# Altium PCB PCB.PcbDoc
Units mm, origin at the board's own origin, x right, y up, seen from the top; angles counter-clockwise.
Board outline 152.4 x 101.6 mm, 2 copper layers (Top Layer, Bottom Layer); 60 components, 47 nets, 204 pads, 40 vias.
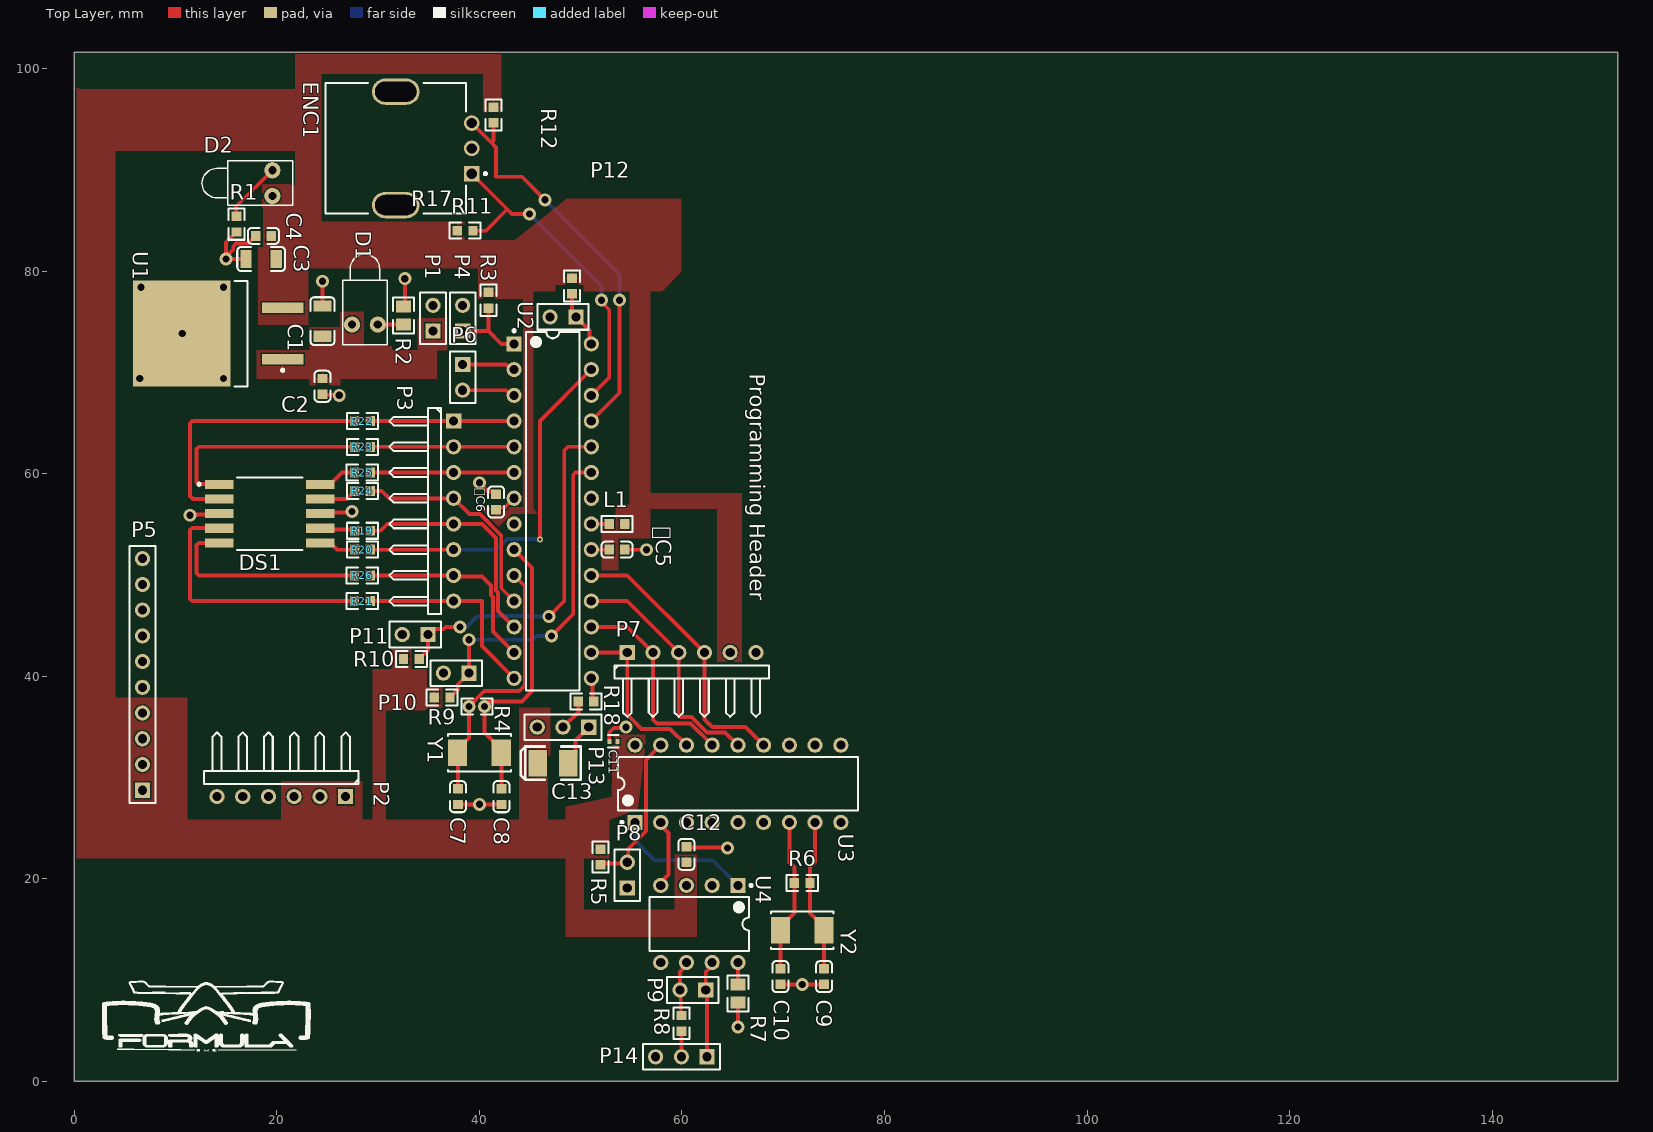
[diagram p0: Top Layer view]
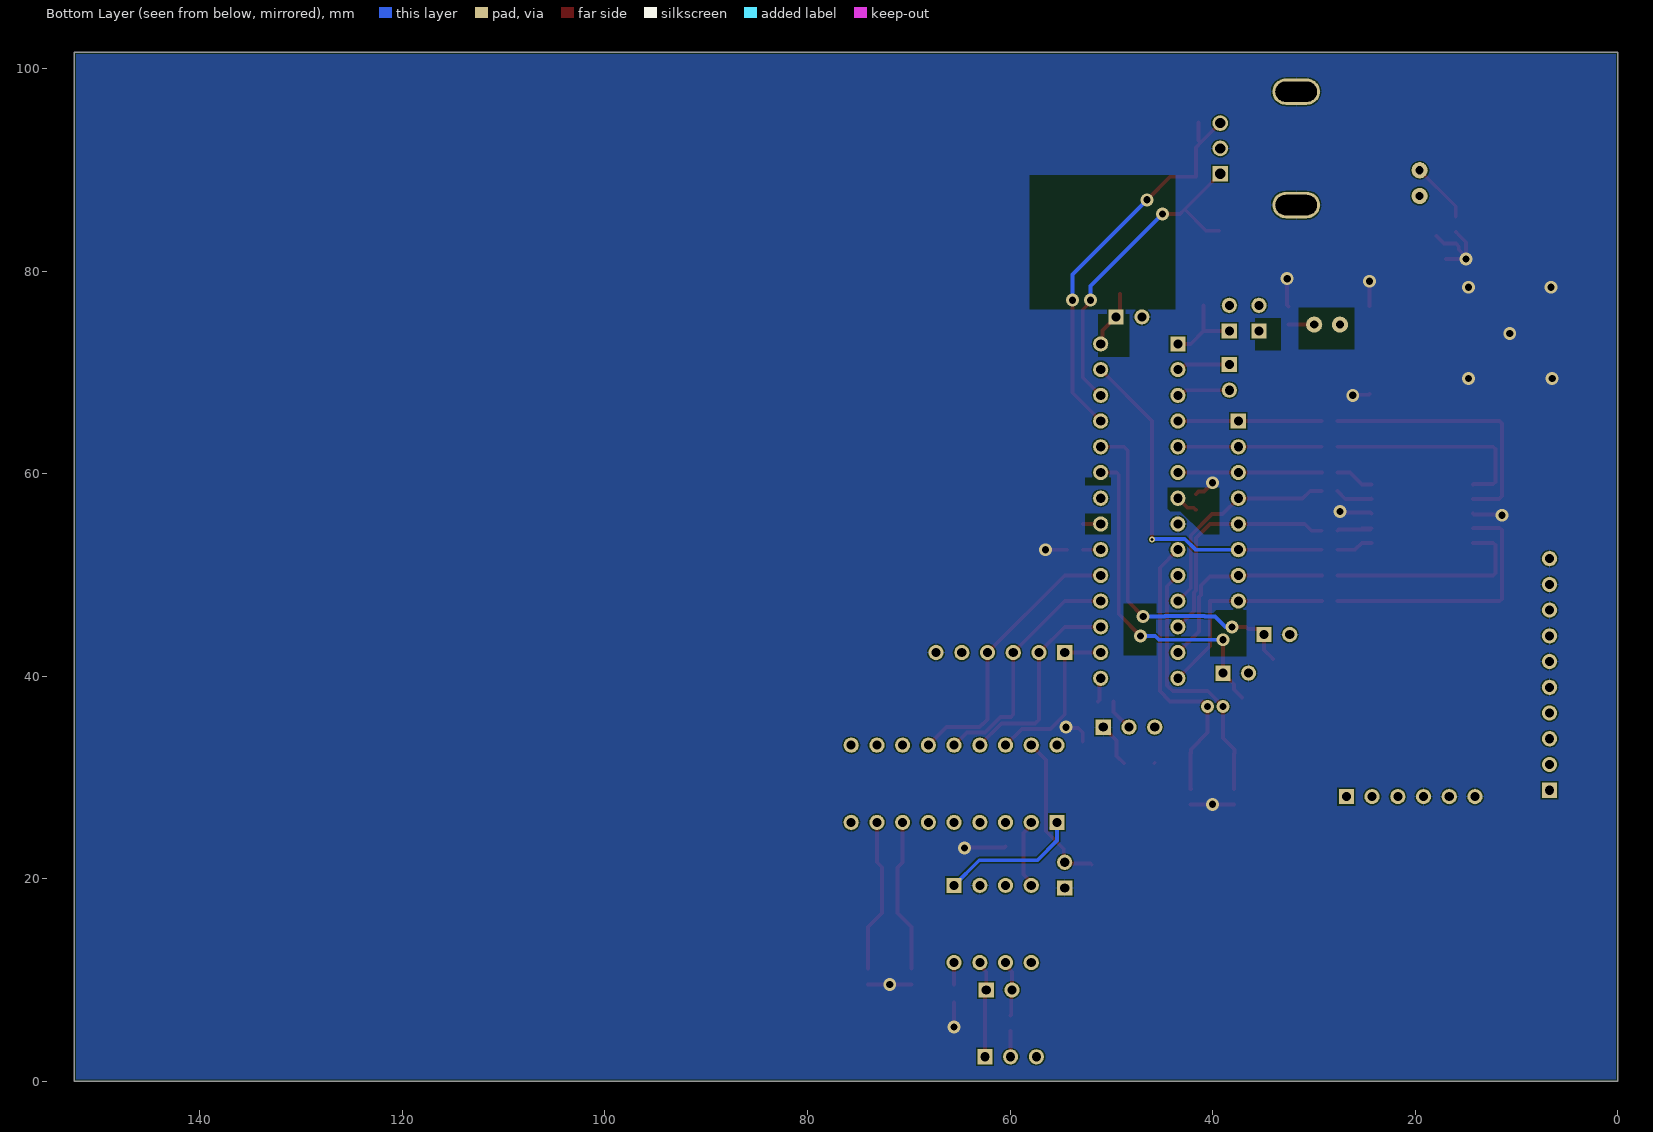
[diagram p1: Bottom Layer view, seen from below]
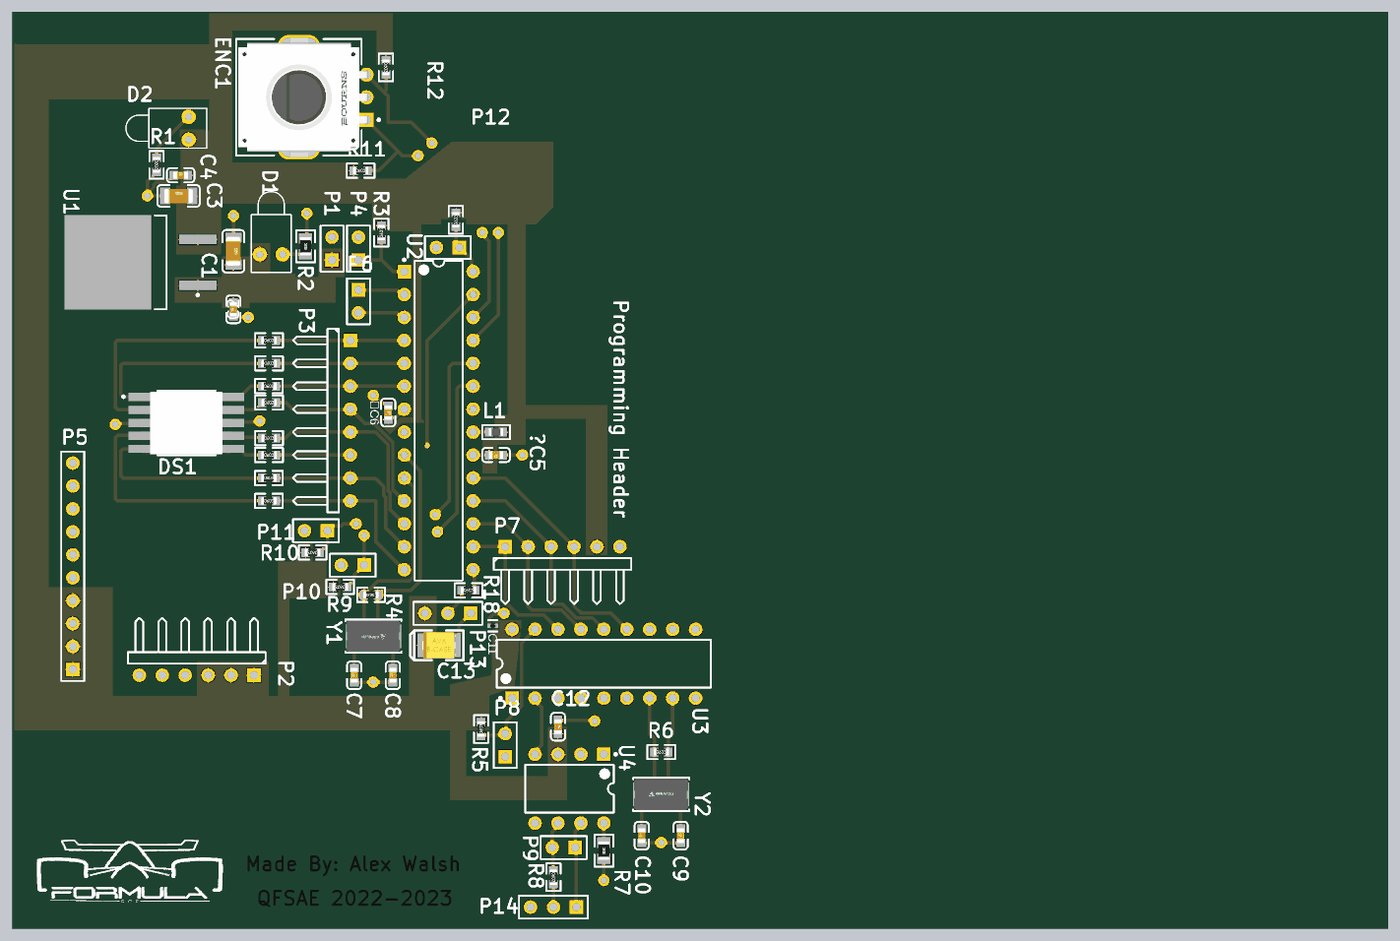
[diagram p2: 3D render of the assembled board from above, using the file's embedded part models]

## Layer stack, top to bottom
Top Solder: solder mask 0.0102, Solder Resist, Dk 3.5
Top Layer: signal copper 0.0356
Dielectric 1: dielectric 0.32, FR-4, Dk 4.8
Bottom Layer: signal copper 0.0356
Bottom Solder: solder mask 0.0102, Solder Resist, Dk 3.5

## Board outline
0,0 152.4,0 152.4,101.6 0,101.6

## Design rules (kind name [scope] priority, off if disabled: settings)
BoardOutlineClearance [All] p1: gap=0.2 ignorepadtopadclearanceinfootprint=FALSE
Clearance [All] p1: gap=0.127 ignorepadtopadclearanceinfootprint=FALSE except(0.25: Arc-Hole Track-Hole SMDPad-Hole THPad-Hole Via-Hole Fill-Hole Poly-Hole Region-Hole Text-Hole)
ComponentClearance [All] p1: gap=0.127 collisioncheckmode=3 verticalgap=0.127 showdistances=TRUE
DiffPairsRouting [All] p1: maxlimit=0.254 minlimit=0.127 mostfreqgap=0.127 toplayer_minwidth=0.127 toplayer_maxwidth=25.4 toplayer_prefwidth=0.127 bottomlayer_minwidth=0.127 bottomlayer_maxwidth=25.4 bottomlayer_prefwidth=0.127 maxuncoupledlength=12.7
Height [All] p1: minheight=0 maxheight=1816.048 prefheight=12.7
HoleSize [All] p1: absolutevalues=TRUE maxlimit=6.3 minlimit=0.3 maxpercent=80.000 minpercent=20.000
HoleToHoleClearance [All] p1: gap=0.25 allowstackedmicrovias=FALSE
MinimumAnnularRing [All] p1: minimumring=0.076
MinimumSolderMaskSliver [All] p1: minsoldermaskwidth=0
PlaneClearance [All] p1: clearance=0.127
PlaneConnect PlaneConnectPowerPads [InPadClass('PowerPads')] p1: planeconnectstyle=Direct reliefexpansion=0.508 reliefentries=4 reliefconductorwidth=0.254 reliefairgap=0.254
PlaneConnect [All] p2: pad.planeconnectstyle=Relief pad.reliefexpansion=0.3 pad.reliefentries=4 pad.reliefconductorwidth=0.127 pad.reliefairgap=0.127 via.planeconnectstyle=Direct via.reliefexpansion=0.3 via.reliefentries=4 via.reliefconductorwidth=0.127 via.reliefairgap=0.127
PolygonConnect PolygonConnectPowerPads [All vs (InPadClass('PowerPads'))] p1: connectstyle=Direct reliefconductorwidth=0.254 reliefentries=4 polygonreliefangle="90 Angle" airgapwidth=0.254
PolygonConnect [All] p2: thpad.connectstyle=Relief thpad.reliefconductorwidth=0.127 thpad.reliefentries=4 thpad.polygonreliefangle="90 Angle" thpad.airgapwidth=0.127 smdpad.connectstyle=Relief smdpad.reliefconductorwidth=0.127 smdpad.reliefentries=4 smdpad.polygonreliefangle="90 Angle" smdpad.airgapwidth=0.127 via.connectstyle=Direct via.reliefconductorwidth=0.127 via.reliefentries=4 via.polygonreliefangle="90 Angle" via.airgapwidth=0.127
RoutingVias [All] p1: holewidth=0.3 width=0.6 viastyle="Through Hole" minholewidth=0.3 minwidth=0.6 maxholewidth=0.6 maxwidth=6.6
SilkToSilkClearance [All] p1: silktosilkclearance=0
SilkToSolderMaskClearance [IsPad] p1: minsilkscreentomaskgap=0.127 clearancetoexposedcopper=TRUE
SolderMaskExpansion [All] p1: expansion=0.075 istentingtop=FALSE
Width [All] p1: maxlimit=25.4 minlimit=0.127 preferedwidth=0.127 minimp=50.000000 maximp=50.000000 favimp=50.000000
20 further rules are at their usual default settings.

## Classes and differential pairs
component class VoltageRegulator: C1 C2 C3 C4 D1 D2 P1 R1 R2 U1
component class startStop: P12 R17
component class shiftLights: C13 P13 R18
component class shifting_buttons: P10 P11 R9 R10
component class rotaryEncoder: ENC1 R11 R12
component class MCP2551: C12 P9 P14 R7 R8 S1 U4
component class MCP2515: C9 C10 C11 P8 R5 R6 U3 Y2
component class atmega328p: C5 C6 C7 C8 FB1 L1 P2 P3 P4 P5 P6 P7 R3 R4 U2 Y1
component class 7_seg_display: DS1 R19 R20 R21 R22 R23 R24 R25 R26
differential pair CAN: +CAN_P -CAN_N

## Components (designator, comment, footprint, x,y, rotation, side; value= is the part's Value field where it differs from the comment)
C5 "100nF" 0603_C 53.589,52.486 r180 top (schematic designator C5)
C6 "100nF" 0603_C 41.651,57.193 r270 top (schematic designator C6)
C1 "10uF" 1206_C 24.506,75.058 r270 top
C2 "330nF" 0603_C 24.506,68.623 r90 top
C3 "10uF" 1206_C 18.444,81.188 r0 top
C4 "330nF" 0603_C 18.672,83.474 r0 top
C7 "22pF" 0603_C 37.883,28.094 r90 top
C8 "22pF" 0603_C 42.167,28.094 r90 top
C9 "22pF" 0603_C 74.036,10.33 r90 top
C10 "22pF" 0603_C 69.718,10.33 r90 top
C11 "GRM155R71C104KA88D" FP-GRM15-MFG 53.227,33.563 r180 top value=0.10μF
C12 "100nF" 0603_C 60.447,22.395 r270 top
C13 "100uF" CASE-B_3528 47.263,31.404 r180 top
D1 "LED1" LED-1 28.697,74.711 r90 top
D2 "LED1" LED-1 19.553,88.681 r180 top
DS1 "ACSC02-41SURKWA-F01" FP-ACSC02-41SURKWA-F01-MFG 19.299,56.042 r0 top
ENC1 "PEC12R-4215F-N0024" FP-PEC12R-4215F-N0024-MFG 31.745,92.11 r90 top
L1 "100R @ 100Mhz 200mA" 0603_L 53.589,55.026 r0 top
P1 "Header 2" HDR1X2 35.428,74.076 r90 top
P2 "Header 6H" HDR1X6H 26.792,28.102 r180 top
P3 "Header 8H" HDR1X8H 37.46,65.186 r270 top
P4 "Header 2" HDR1X2 38.349,74.076 r90 top
P5 "Header 10" HDR1X10 6.726,28.737 r90 top
P6 "Header 2" HDR1X2 38.349,70.774 r270 top
P7 "Header 6H" HDR1X6H 54.605,42.326 r0 top
P8 "Header 2" HDR1X2 54.605,19.085 r90 top
P9 "Header 2" HDR1X2 62.357,9.017 r180 top
P10 "Header 2" HDR1X2 38.984,40.294 r180 top
P11 "Header 2" HDR1X2 34.92,44.104 r180 top
P12 "Header 2" HDR1X2 49.525,75.473 r180 top
P13 "Header 3" HDR1X3 50.795,34.96 r180 top
P14 "Header 3" HDR1X3 62.484,2.413 r180 top
R1 "330Ω ±1%" 0603_R 15.997,84.625 r270 top
R2 "1KΩ ±1%" 0805_R 32.507,75.601 r270 top
R3 "10KΩ ±1%" 0603_R 40.889,77.116 r90 top
R4 "1MΩ ±1%" 0603_R 39.746,36.992 r180 top
R5 "10KΩ ±1%" 0603_R 51.938,22.141 r90 top
R6 "1MΩ ±1%" 0603_R 71.877,19.593 r0 top
R7 "10KΩ ±1%" 0805_R 65.527,8.67 r270 top
R8 "120Ω ±1%" 0603_R 59.944,5.723 r270 top
R9 "10KΩ ±1%" 0603_R 36.325,37.881 r180 top
R10 "10KΩ ±1%" 0603_R 33.277,41.691 r180 top
R11 "10KΩ ±1%" 0603_R 38.595,83.982 r0 top
R12 "10KΩ ±1%" 0603_R 41.397,95.42 r270 top
R17 "10KΩ ±1%" 0603_R 49.144,78.529 r90 top
R18 "470Ω ±1%" 0603_R 50.541,37.5 r0 top
R19 "330Ω ±1%" 0603_R 28.456,54.356 r0 top
R20 "330Ω ±1%" 0603_R 28.451,52.486 r0 top
R21 "330Ω ±1%" 0603_R 28.435,47.406 r0 top
R22 "330Ω ±1%" 0603_R 28.451,65.186 r0 top
R23 "330Ω ±1%" 0603_R 28.451,62.646 r0 top
R24 "330Ω ±1%" 0603_R 28.456,58.293 r0 top
R25 "330Ω ±1%" 0603_R 28.435,60.106 r0 top
R26 "330Ω ±1%" 0603_R 28.435,49.946 r0 top
U1 "L7805CD2T-TR" TO-263_M 14.219,73.822 r180 top
U2 "ATmega328-PU" 28P3 47.239,56.296 r0 top
U3 "MCP2515-I/P" PDIP300-P18 65.527,29.372 r90 top
U4 "MCP2551-I/P" PDIP300-P8 61.717,15.529 r270 top
Y1 "ABM7-16.000MHZ-D2Y-T" FP-ABM7-MFG 40,32.42 r180 top
Y2 "ABM7-16.000MHZ-D2Y-T" FP-ABM7-MFG 71.877,14.894 r0 top

## Footprints (in the part's own frame and the unit in brackets; to place one, negate y for a bottom-side part, rotate by r counter-clockwise, add the part's x,y. Pads: shape width x height; smd on the part's side, far side on the other; paste and mask are expansions set on the pad)
28P3 [mm] "28-Pin Plastic Dual In-Line Package (PDIP)"
  rect 1.5x1.5 hole 0.9: 1(-3.81,16.51)
  round 1.5 hole 0.9: 2(-3.81,13.97) 3(-3.81,11.43) 4(-3.81,8.89) 5(-3.81,6.35) 6(-3.81,3.81) 7(-3.81,1.27) 8(-3.81,-1.27) 9(-3.81,-3.81) 10(-3.81,-6.35) 11(-3.81,-8.89) 12(-3.81,-11.43) 13(-3.81,-13.97) 14(-3.81,-16.51) 15(3.81,-16.51) 16(3.81,-13.97) 17(3.81,-11.43) 18(3.81,-8.89) 19(3.81,-6.35) 20(3.81,-3.81) 21(3.81,-1.27) 22(3.81,1.27) 23(3.81,3.81) 24(3.81,6.35) 25(3.81,8.89) 26(3.81,11.43) 27(3.81,13.97) 28(3.81,16.51)
  silkscreen extent -3.93,-17.7 2.65,17.93, body extent -3.6,-17.65 3.6,17.65, height 4.58
0603_C [mm]
  rect 0.93x0.98 smd: 1(-0.77,0) 2(0.77,0)
  silkscreen extent -1.53,-0.79 1.54,0.79, body extent -0.8,-0.4 0.8,0.4, height 0.3
0603_L [mm]
  rect 0.93x0.98 smd: 1(-0.77,0) 2(0.77,0)
  silkscreen extent -1.53,-0.79 1.54,0.79, body extent -0.82,-0.41 0.83,0.41, height 0.46
0603_R [mm]
  rect 0.93x0.98 smd: 1(-0.77,0) 2(0.77,0)
  silkscreen extent -1.53,-0.79 1.54,0.79, body extent -0.85,-0.4 0.85,0.4, height 0.56
0805_R [mm]
  rect 1.16x1.47 smd: 1(-0.89,0) 2(0.89,0)
  silkscreen extent -1.77,-1.04 1.77,1.03, body extent -1,-0.62 1,0.63, height 0.49
1206_C [mm]
  rect 1.13x1.8 smd: 1(-1.49,0) 2(1.49,0)
  silkscreen extent -2.36,-1.2 2.35,1.2, body extent -1.6,-0.81 1.6,0.79, height 1
CASE-B_3528 [mm]
  rect 1.8x2.6 smd: 1(1.5,0) 2(-1.5,0)
  silkscreen extent -2.73,-1.65 3.16,1.65, body extent -1.85,-1.47 1.85,1.46, height 2.03
FP-ABM7-MFG [mm]
  rect 1.9x2.6 smd paste+0 mask+0: 1(-2.15,0) 2(2.15,0)
  silkscreen extent -3.1,-1.85 3.1,1.85, body extent -3.2,-1.95 3.2,1.95, height 0.25
FP-ACSC02-41SURKWA-F01-MFG [mm]
  rect 2.8x0.9 smd paste+0 mask+0: 1(-5,2.88) 2(-5,1.44) 3(-5,0) 4(-5,-1.44) 5(-5,-2.88) 6(5,-2.88) 7(5,-1.44) 8(5,0) 9(5,1.44) 10(5,2.88)
  silkscreen extent -7.1,-3.57 3.22,3.57, body extent -6.5,-3.67 6.5,3.67, height 0.25
FP-GRM15-MFG [mm]
  rect 0.4x0.5 smd paste+0 mask+0: 1(-0.4,0) 2(0.4,0)
  silkscreen extent -0.53,-0.63 0.53,0.63, body extent -0.7,-0.38 0.7,0.38, height 0.25
FP-PEC12R-4215F-N0024-MFG [mm]
  rrect100% 2.6x4.7 hole 4.1 slot 2 at 0 deg paste-1000 mask+0: 1(-5.6,0) 2(5.6,0)
  rect 1.55x1.55 hole 1 paste-1000 mask+0: A(-2.5,-7.5)
  round 1.55 hole 1 paste-1000 mask+0: B(2.5,-7.5) C(0,-7.5)
  silkscreen extent -6.45,-8.98 6.45,6.95, body extent -7,-8.37 7,7.05, height 0.25
HDR1X2 [mm] "Connector; Header; 2 Position"
  rect 1.5x1.5 hole 0.9: 1(0,0)
  round 1.5 hole 0.9: 2(2.54,0)
  silkscreen extent -1.27,-1.27 3.81,1.27
HDR1X3 [mm] "Connector; Header; 3 Position"
  rect 1.5x1.5 hole 0.9: 1(0,0)
  round 1.5 hole 0.9: 2(2.54,0) 3(5.08,0)
  silkscreen extent -1.27,-1.27 6.35,1.27
HDR1X6H [mm] "Connector; Header; 6 Position; Right Angle"
  rect 1.5x1.5 hole 0.9: 1(0,0)
  round 1.5 hole 0.9: 2(2.54,0) 3(5.08,0) 4(7.62,0) 5(10.16,0) 6(12.7,0)
  silkscreen extent -1.27,-6.35 13.97,-1.27
HDR1X8H [mm] "Connector; Header; 8 Position; Right Angle"
  rect 1.5x1.5 hole 0.9: 1(0,0)
  round 1.5 hole 0.9: 2(2.54,0) 3(5.08,0) 4(7.62,0) 5(10.16,0) 6(12.7,0) 7(15.24,0) 8(17.78,0)
  silkscreen extent -1.27,-6.35 19.05,-1.27
HDR1X10 [mm] "Connector; Header; 10 Position"
  rect 1.5x1.5 hole 0.9: 1(0,0)
  round 1.5 hole 0.9: 2(2.54,0) 3(5.08,0) 4(7.62,0) 5(10.16,0) 6(12.7,0) 7(15.24,0) 8(17.78,0) 9(20.32,0) 10(22.86,0)
  silkscreen extent -1.27,-1.27 24.13,1.27
LED-1 [mm] "LED; 2 Leads"
  round 1.6 hole 0.8: 1(0,1.27) 2(0,-1.27)
  silkscreen extent -2,-2.2 6.95,2.2
PDIP300-P8 [mm] "8-Pin Plastic Dual In-Line Package (PDIP)"
  rect 1.5x1.5 hole 0.9: 1(-3.81,3.81)
  round 1.5 hole 0.9: 2(-3.81,1.27) 3(-3.81,-1.27) 4(-3.81,-3.81) 5(3.81,-3.81) 6(3.81,-1.27) 7(3.81,1.27) 8(3.81,3.81)
  silkscreen extent -3.93,-4.9 2.65,5.24, body extent -3.55,-4.9 3.55,4.9, height 4.32
PDIP300-P18 [mm] "DIP, 18-Pin, Row Spacing 7.62 mm, Pitch 2.54 mm"
  rect 1.5x1.5 hole 0.9: 1(-3.81,10.16)
  round 1.5 hole 0.9: 2(-3.81,7.62) 3(-3.81,5.08) 4(-3.81,2.54) 5(-3.81,0) 6(-3.81,-2.54) 7(-3.81,-5.08) 8(-3.81,-7.62) 9(-3.81,-10.16) 10(3.81,-10.16) 11(3.81,-7.62) 12(3.81,-5.08) 13(3.81,-2.54) 14(3.81,0) 15(3.81,2.54) 16(3.81,5.08) 17(3.81,7.62) 18(3.81,10.16)
  silkscreen extent -3.93,-11.85 2.65,11.85, body extent -3.6,-11.8 3.6,11.8, height 5.33
TO-263_M [mm] "D2-PAK, 4-Leads, Body 9.2x10.2mm, Pitch 2.54mm, Lead Span 15.4mm, IPC Low Density"
  rect 4.1x1.05 smd: 1(-6.35,2.54) 3(-6.35,-2.54)
  rect 9.6x10.45 smd: 4(3.6,0)
  silkscreen extent -6.48,-5.2 -1.6,5.2, body extent -2.9,-5.2 6.45,5.2, height 4.6

## Part data
C5 C6 C12: library part "0603 100nF (104) 10% 50V", "Chip capacitors", Manufacturer=YAGEO, Package=0603, PartNumber=CC0603KRX7R9BB104, SuppliersPartNumber=C14663, Tolerance=10%, Voltage=50V, Capacitance=100nF, ComponentLink1Description="Supplier link", ComponentLink1URL=http://www.szlcsc.com/product/details_15331.html, Supplier=LC
C1 C3: library part "1206 10uF (106) 10% 50V", "Chip capacitors", Manufacturer="Samsung Electro-Mechanics", Package=1206, PartNumber=CL31A106KBHNNNE, SuppliersPartNumber=C13585, Tolerance=10%, Voltage=50V, Capacitance=10uF, ComponentLink1Description="Supplier link", ComponentLink1URL=http://www.szlcsc.com/product/details_14236.html, Supplier=LC
C2 C4: library part "0603 330nF (334) 10% 25V", "Chip capacitors", Manufacturer="Guangdong Fenghua Advanced Tech", Package=0603, PartNumber=0603B334K250NT, SuppliersPartNumber=C1615, Tolerance=10%, Voltage=25V, Capacitance=330nF, ComponentLink1Description="Supplier link", ComponentLink1URL=http://www.szlcsc.com/product/details_1967.html, Supplier=LC
C7 C8 C9 C10: library part "0603 22pF (220) 5% 50V", "Chip capacitors", Manufacturer="Samsung Electro-Mechanics", Package=0603, PartNumber=CL10C220JB8NNNC, SuppliersPartNumber=C1653, Tolerance=5%, Voltage=50V, Capacitance=22pF, ComponentLink1Description="Supplier link", ComponentLink1URL=http://www.szlcsc.com/product/details_2005.html, Supplier=LC
C11: library part CMP-2100-03641-2, "CAP CER 0.1UF 16V X7R 0402", Capacitance=0.10μF, Manufacturer=Murata, Package=GRM15, Temperature="-55°C to +125°C", Temperature Characteristic=X7R, Temperature Range High=+125°C, Temperature Range Low=-55°C, Tolerance=10%, Voltage rating=16Vdc, Category=Cap, ComponentLink2Description=Datasheet, ComponentLink2URL=https://search.murata.co.jp/Ceramy/image/img/A01X/G101/ENG/GRM155R71H471KA01-01A.pdf, Device Class L1="Passive Components", Device Class L2=Capacitors, Device Class L3="Ceramic Capacitors", Digikey Description="CAP CER 0.1UF 16V X7R 0402", Height=0.55mm, Ipc Land Pattern Name=CAPC10050X219, Lead Free=yes, Manufacturer Part Number=GRM155R71C104KA88D, Material=Ceramic, Mouser Description="0402 0.1 uF 16V ±10 % Tolerance X7R SMT Multilayer Ceramic Capacitor", Octopart=https://octopart.com/grm155r71c104ka88d-murata-196880, RoHS=TRUE, Standoff Height=0mm
C13: library part "3528 100uF (107) 10% 6.3V", "Tantalum capacitor", Manufacturer=AVX, Package=3528, PartNumber=TAJB107K006RNJ, SuppliersPartNumber=C16133, Tolerance=10%, Voltage=6.3V, Capacitance=100uF, ComponentLink1Description="Supplier link", ComponentLink1URL=http://www.szlcsc.com/product/details_16815.html, Supplier=LC
D1 D2: "Typical RED GaAs LED", LatestRevisionDate=08-Jul-2005, LatestRevisionNote="Mech Layer 1 removed.", PackageDescription="LED; 2 Leads", PackageReference=LED-1, Published=8-Jun-2000, Publisher="Altium Limited"
DS1: library part CMP-44525-000002-1, "DISPLAY 7-SEG 0.2\" SGL RED 10SMD", Case/Package=SMD/SMT, Color=Red, Forward Current=30mA, Forward Voltage=1.95V, Max Operating Temperature=85°C, Max Power Dissipation=75mW, Min Operating Temperature=-40°C, Package Quantity=650, Test Current=20mA, Element Configuration="Common Cathode", Height=0.315inch, Illumination Color=Red, Lead Free="Lead Free", Luminous Intensity=30mcd, Number of Characters=1, Operating Supply Voltage=1.95V, Packaging="Tape and Reel", Power Consumption=75mW, Wavelength=630nm, Width=0.272inch
ENC1: library part CMP-07421-000052-1, "ROTARY ENCODER", Length=13.4mm, RoHS Compliant=Yes, Width=12.5mm
L1: library part "0603 100R@100Mhz 0.2A", "Ferrite Bead", Package=0603, SuppliersPartNumber=C98498, Supplier=LC
P1 P4 P6 P8 P9 P10 P11 P12: "Header, 2-Pin", LatestRevisionDate=17-Jul-2002, LatestRevisionNote="Re-released for DXP Platform.", Publisher="Altium Limited"
P2 P7: "Header, 6-Pin, Right Angle", LatestRevisionDate=17-Jul-2002, LatestRevisionNote="Re-released for DXP Platform.", Publisher="Altium Limited"
P3: "Header, 8-Pin, Right Angle", LatestRevisionDate=17-Jul-2002, LatestRevisionNote="Re-released for DXP Platform.", Publisher="Altium Limited"
P5: "Header, 10-Pin", LatestRevisionDate=17-Jul-2002, LatestRevisionNote="Re-released for DXP Platform.", Publisher="Altium Limited"
P13 P14: "Header, 3-Pin", LatestRevisionDate=17-Jul-2002, LatestRevisionNote="Re-released for DXP Platform.", Publisher="Altium Limited"
R1 R19 R20 R21 R22 R23 R24 R25 R26: library part "0603 330R (3300) 1%", "Chip resistor", Manufacturer="Uniroyal Elec", Package=0603, PartNumber=0603WAF3300T5E, Power=1/10W, Resistance=330Ω, SuppliersPartNumber=C23138, Tolerance=1%, ComponentLink1Description="Supplier link", ComponentLink1URL=http://www.szlcsc.com/product/details_23865.html, Supplier=LC
R2: library part "0805 1K (1001) 1%", "Chip resistor", Manufacturer="Uniroyal Elec", Package=0805, Power=1/8W, SuppliersPartNumber=C17513, Tolerance=1%, ComponentLink1Description="Supplier link", ComponentLink1URL=http://www.szlcsc.com/product/details_18201.html, Supplier=LC
R3 R5 R9 R10 R11 R12 R17: library part "0603 10K (1002) 1%", "Chip resistor", Manufacturer="Uniroyal Elec", Package=0603, PartNumber=0603WAF1002T5E, Power=1/10W, Resistance=10KΩ, SuppliersPartNumber=C25804, Tolerance=1%, ComponentLink1Description="Supplier link", ComponentLink1URL=http://www.szlcsc.com/product/details_26547.html, Supplier=LC
R4 R6: library part "0603 1M (1004) 1%", "Chip resistor", Manufacturer="Uniroyal Elec", Package=0603, PartNumber=0603WAF1004T5E, Power=1/10W, Resistance=1MΩ, SuppliersPartNumber=C22935, Tolerance=1%, ComponentLink1Description="Supplier link", ComponentLink1URL=http://www.szlcsc.com/product/details_23662.html, Supplier=LC
R7: library part "0805 10K (1002) 1%", "Chip resistor", Manufacturer="Uniroyal Elec", Package=0805, PartNumber=0805W8F1002T5E, Power=1/8W, Resistance=10KΩ, SuppliersPartNumber=C17414, Tolerance=1%, ComponentLink1Description="Supplier link", ComponentLink1URL=http://www.szlcsc.com/product/details_18102.html, Supplier=LC
R8: library part "0603 120R (1200) 1%", "Chip resistor", Manufacturer="Uniroyal Elec", Package=0603, PartNumber=0603WAF1200T5E, Power=1/10W, Resistance=120Ω, SuppliersPartNumber=C22787, Tolerance=1%, ComponentLink1Description="Supplier link", ComponentLink1URL=http://www.szlcsc.com/product/details_23514.html, Supplier=LC
R18: library part "0603 470R (4700) 1%", "Chip resistor", Manufacturer="Uniroyal Elec", Package=0603, PartNumber=0603WAF4700T5E, Power=1/10W, Resistance=470Ω, SuppliersPartNumber=C23179, Tolerance=1%, ComponentLink1Description="Supplier link", ComponentLink1URL=http://www.szlcsc.com/product/details_23906.html, Supplier=LC
U1: library part CMP-0244-00213-1, "Positive Voltage Regulator, 3-Pin D2PAK, Tape and Reel", ComponentLink1Description="Manufacturer URL", ComponentLink1URL=http://www.st.com, ComponentLink2Description=Datasheet, ComponentLink2URL=http://www.st.com/internet/com/TECHNICAL_RESOURCES/TECHNICAL_LITERATURE/DATASHEET/CD00000444.pdf, DatasheetVersion=16/11/2011, PackageDescription="3-Pin Transistor Outline Package 2.54 mm Pitch, 15.4 mm Lead Span (D2PAK)", PackageReference=TO-263, PackageVersion=2011
U2: library part CMP-0095-00015-2, "8-bit AVR Microcontroller, 32KB Flash, 1KB EEPROM, 2KB SRAM, 28-pin PDIP, Industrial Grade (-40°C to 85°C)", ComponentLink1Description="Manufacturer URL", ComponentLink1URL=http://www.atmel.com/, ComponentLink2Description="ATmega48A/48PA/88A/88PA/168A/168PA/328/328P Datasheet", ComponentLink2URL=http://www.atmel.com/dyn/resources/prod_documents/8271.pdf, ComponentLink3Description="ATmega48A/48PA/88A/88PA/168A/168PA/328/328P Summary", ComponentLink3URL=http://www.atmel.com/dyn/resources/prod_documents/8271S.pdf, DatasheetVersion="revD, May-2011", PackageDescription="28-lead (0.300\"/7.62mm Wide) Plastic Dual Inline Package (PDIP)", PackageReference=28P3, PackageVersion="revB, Sep-2001", RevisionNote="DatasheetVersion updated. URLs added."
U3: library part CMP-0186-00010-2, "Stand-Alone CAN Controller With SPI Interface, 18-Pin PDIP, Industrial Temperature", Code_JEDEC=MS-001, ComponentLink1Description="Manufacturer URL", ComponentLink1URL=http://www.microchip.com/, ComponentLink2Description=Datasheet, ComponentLink2URL=http://ww1.microchip.com/downloads/en/DeviceDoc/21801f.pdf, ComponentLink3Description="Package Specification", ComponentLink3URL=http://www.microchip.com/stellent/groups/techpub_sg/documents/packagingspec/en012702.pdf, DatasheetVersion="revF, Oct-2010", PackageDescription="18-Lead Plastic Dual In-Line (P) - 300 mil Body [PDIP]", PackageReference=PDIP300-P18, PackageVersion="revBB, Aug-2009", RevisionNote="URLs added. DatasheetVersion updated."
U4: library part CMP-0186-00101-2, "High-Speed CAN Transceiver, 8-Pin PDIP, Industrial Temperature", Code_JEDEC=MS-001, ComponentLink1Description="Manufacturer URL", ComponentLink1URL=http://www.microchip.com/, ComponentLink2Description=Datasheet, ComponentLink2URL=http://ww1.microchip.com/downloads/en/DeviceDoc/21667F.pdf, ComponentLink3Description="Package Specification", ComponentLink3URL=http://www.microchip.com/stellent/groups/techpub_sg/documents/packagingspec/en012702.pdf, DatasheetVersion="revF, Jul-2010", PackageDescription="8-Lead Plastic Dual In-Line (P) - 300 mil Body [PDIP]", PackageReference=PDIP300-P8, PackageVersion="revBB, Aug-2009", RevisionNote="URLs added. DatasheetVersion updated."
Y1 Y2: library part CMP-27762-000095-1, "Crystal 16MHz ±20ppm 18pF SMD-2 6mm x 3.5mm", Case/Package=CSMD, ESR (Equivalent Series Resistance)=50R, Frequency=16MHz, Frequency Stability=30ppm, Frequency Tolerance=20ppm, Load Capacitance=18pF, Max Operating Temperature=85°C, Min Operating Temperature=-40°C, Operating Frequency="16 MHz", Package Quantity=1000, Resistor Type=Ceramic, Depth=3.5mm, Height=0.055inch, Lead Free="Lead Free", Length=6mm, Mount="Surface Mount", Number of Pins=2, Packaging="Tape and Reel", Radiation Hardening=No, Series=ABM7, Termination=SMD/SMT, Tolerance=20ppm, Width=3.3mm

## Via types
v1: diameter 1.27, hole 0.711, Top Layer to Bottom Layer, 39 vias
v2: diameter 0.6, hole 0.3, Top Layer to Bottom Layer, 1 vias

## Nets (pads, with @x,y where several pads share a name; then routed paths per layer and width w, separated by ;. In a path a pad name is that pad's centre, name@x,y a point inside that pad or via, vN(x,y) a via of type N, cw(c..) or ccw(c..) an arc to the next point about the centre after c; other vN are vias at no path point)
A_ANODE_OUT: P3.5 R19.2 U2.12 | length 22.8
  Top Layer w0.381: R19.2 30.226,54.356 30.896,55.026 P3.5 40.254,55.026 41.651,53.629 41.651,48.466 41.854,48.263 41.854,46.442 U2.12
B_ANODE_OUT: P3.6 R20.2 U2.27 | length 36.1
  Top Layer w0.381: R20.2 v1(37.46,52.486) ; v2(45.969,53.502) 45.969,65.186 v1(51.049,70.266)
  Bottom Layer w0.381: v1(37.46,52.486) 41.681,52.486 42.748,53.554 45.859,53.554 45.91,53.502 v2(45.969,53.502)
C_ANODE_OUT: P3.8 R21.2 U2.14 | length 20
  Top Layer w0.381: R21.2 P3.8 40.254,47.406 40.254,42.961 U2.14
CAN_N: P9.2 R8.1 U4.6 | length 5.5
  Top Layer w0.381: R8.1 59.88,6.557 59.88,8.954 P9.2 59.817,10.786 60.447,11.417 U4.6
CAN_P: P9.1 P14.1 U4.7 | length 9.6
  Top Layer w0.381: P14.1 62.484,8.89 P9.1 62.357,10.786 62.987,11.417 U4.7
D_ANODE_OUT: P3.1 R22.2 U2.4 | length 14.2
  Top Layer w0.381: R22.2 P3.1 U2.4
DA_OUT: P3.7 R26.2 U2.13 | length 19.9
  Top Layer w0.381: R26.2 P3.7 37.551,49.855 40.254,49.855 41.143,48.966 41.143,48.027 41.346,47.825 41.346,44.41 U2.13
DOWNSHIFT: P11.1 R10.1 U2.24 | length 35.3
  Top Layer w0.381: R10.1 34.047,41.716 34.92,42.589 P11.1 35.48,44.664 36.481,44.664 36.684,44.866 v1(38.095,44.866) ; v1(46.858,45.882) 48.382,47.406 48.382,62.265 48.763,62.646 U2.24
  Bottom Layer w0.381: v1(38.095,44.866) 38.73,44.866 39.746,45.882 40.762,45.882 40.814,45.934 44.692,45.934 44.743,45.882 v1(46.858,45.882)
E_ANODE_OUT: P3.2 R23.2 U2.5 | length 14.2
  Top Layer w0.381: R23.2 P3.2 U2.5
F_ANODE_OUT: P3.4 R24.2 U2.11 | length 21.8
  Top Layer w0.381: R24.2 30.353,58.293 31.115,57.531 37.425,57.531 P3.4 39.028,55.999 40.044,55.999 42.159,53.883 42.159,48.676 U2.11
G_ANODE_OUT: P3.3 R25.2 U2.6 | length 13.8
  Top Layer w0.381: R25.2 P3.3@37.079,60.106 ; P3.3 U2.6
GND: C5.1 C6.1 C1.1 C2.1 C3.1 C4.1 C7.1 C8.1 C9.1 C10.1 C11.2 C12.1 C13.2 DS1.3 DS1.8 ENC1.1 ENC1.2 ENC1.C P1.2 P2.4 P2.5 P2.6 P4.2 P5.5 P5.6 P5.7 P5.8 P5.9 P5.10 P7.6 P8.1 P10.2 P11.2 P12.2 P13.1 R1.2 R2.1 R7.2 U1.4 U2.8 U2.22 U3.9 U4.2 | length 49
  Top Layer w0.381: v1(11.43,55.88) 11.511,55.961 14.218,55.961 DS1.3 ; R1.2 15.972,83.855 15.698,83.581 15.698,83.556 14.981,82.839 v1@14.981,81.429 ; C3.1 v1(14.981,81.188) v1@14.981,81.429 ; C4.1 17.902,83.449 17.165,82.712 15.967,82.712 15.69,82.436 15.69,82.138 v1@14.981,81.429 ; DS1.8 24.409,56.152 27.323,56.152 v1(27.432,56.261) ; C2.1 24.57,67.79 26.094,67.79 v1(26.157,67.726) ; C1.1 24.511,76.553 v1(24.511,78.994) ; R2.1 32.639,76.623 v1(32.639,79.248) ; C7.1 37.891,27.332 39.992,27.332 v1(40,27.34) 40.008,27.332 42.159,27.332 C8.1 ; v1(40,59.09) 40.854,58.237 41.378,58.237 C6.1 ; C13.2 49.473,32.114 49.473,33.638 P13.1 ; C11.2 52.827,34.452 53.272,34.897 54.415,34.897 v1(54.478,34.96) ; C5.1 v1(56.51,52.486) ; C12.1 60.519,23.094 64.44,23.094 v1(64.511,23.022) ; U4.2 U4.2@62.987,19.642 ; v1(65.527,5.369) R7.2 ; C10.1 C9.1
  other v1: 71.877,9.56 43.429,55.026 51.049,57.566 6.472,69.377 14.727,69.377 10.663,73.822 35.428,76.616 38.349,76.616 6.599,78.394 14.727,78.394 31.809,86.574 39.182,92.047 31.682,97.647
MISO: P7.3 U2.18 U3.14 | length 24
  Top Layer w0.381: U2.18 54.605,47.406 P7.3 59.685,36.2 59.909,35.976 60.955,35.976 62.479,34.452 64.257,34.452 U3.14
MOSI: P7.2 U2.17 U3.15 | length 20.7
  Top Layer w0.381: U2.17 54.605,44.866 P7.2 57.145,35.692 57.531,35.306 60.864,35.306 U3.15
NEOPIXELS_OUT: R18.2 U2.15 | length 2.4
  Top Layer w0.381: U2.15 51.18,39.655 51.18,37.631 R18.2
NetC7_2: C7.2 R4.2 U2.10 Y1.2 | length 26.3
  Top Layer w0.381: C7.2@37.908,28.864 C7.2 37.883,32.388 Y1.2 37.85,32.77 38.976,33.896 v1(38.976,36.992) 38.976,37.017 40.475,38.516 43.937,38.516 44.497,39.076 44.497,48.879 v1(43.429,49.946)
NetC8_2: C8.2 R4.1 U2.9 Y1.1 | length 28.9
  Top Layer w0.381: C8.2 42.142,28.864 42.167,28.889 42.167,32.404 Y1.1 42.15,32.77 40.5,34.42 v1(40.5,36.992) 40.5,37.001 40.791,37.292 40.8,37.292 41.008,37.5 44.191,37.5 45.207,38.516 45.207,50.708 v1(43.429,52.486)
NetC9_2: C9.2 R6.2 U3.8 Y2.2 | length 15.2
  Top Layer w0.381: U3.8 73.147,21.625 72.647,21.125 R6.2 72.647,16.624 74.027,15.244 Y2.2 74.036,14.885 C9.2
NetC10_2: C10.2 R6.1 U3.7 Y2.1 | length 15.2
  Top Layer w0.381: C10.2 69.718,14.885 Y2.1 69.727,15.244 71.107,16.624 R6.1 71.107,21.094 70.607,21.594 U3.7
NetD1_2: D1.2 R2.2 | length 2.5
  Top Layer w0.381: D1.2 R2.2
NetD2_2: D2.2 R1.1 | length 6
  Top Layer w0.381: R1.1 15.997,86.395 D2.2
NetDS1_1: DS1.1 R23.1 | length 21.3
  Top Layer w0.381: DS1.1 14.258,58.963 12.284,58.963 12.06,59.187 12.06,62.423 12.284,62.646 R23.1
NetDS1_2: DS1.2 R22.1 | length 26.5
  Top Layer w0.381: DS1.2 11.733,57.482 11.425,57.79 11.425,64.963 11.649,65.186 R22.1
NetDS1_4: DS1.4 R21.1 | length 26.1
  Top Layer w0.381: DS1.4 14.256,54.645 11.649,54.645 11.425,54.422 11.425,47.63 11.649,47.406 R21.1
NetDS1_5: DS1.5 R26.1 | length 20.8
  Top Layer w0.381: DS1.5 12.284,53.162 12.06,52.939 12.06,50.17 12.284,49.946 R26.1
NetDS1_6: DS1.6 R20.1 | length 3.7
  Top Layer w0.381: DS1.6 25.249,53.162 25.925,52.486 R20.1
NetDS1_7: DS1.7 R19.1 | length 4.4
  Top Layer w0.381: DS1.7@25.249,54.602 DS1.7 24.423,54.479 27.563,54.479 R19.1
NetDS1_9: DS1.9 R24.1 | length 3.8
  Top Layer w0.381: DS1.9@24.341,57.524 DS1.9 26.9,57.482 27.686,58.268 R24.1
NetDS1_10: DS1.10 R25.1 | length 3.9
  Top Layer w0.381: DS1.10 25.249,58.922 26.433,60.106 R25.1
NetENC1_A: ENC1.A R11.2 U2.26 | length 33.5
  Top Layer w0.381: ENC1.A 42.754,86.101 ; R11.2 40.635,83.982 42.754,86.101 ; v1(44.953,85.633) 43.222,85.633 42.754,86.101 ; U2.26 52.827,69.504 52.827,76.18 52.065,76.942 v1(52.065,77.124)
  Bottom Layer w0.381: v1(44.953,85.633) 52.065,78.521 v1(52.065,77.124)
NetENC1_B: ENC1.B R12.2 U2.25 | length 40.2
  Top Layer w0.381: ENC1.B@39.265,94.63 ENC1.B 41.19,92.665 ; R12.2 41.397,92.872 41.19,92.665 ; v1(46.477,87.03) 44.191,89.316 41.651,89.316 41.651,92.204 41.19,92.665 ; U2.25 53.843,67.98 v1(53.843,77.124)
  Bottom Layer w0.381: v1(46.477,87.03) 53.843,79.664 v1(53.843,77.124)
NetL1_1: L1.1 U2.21 | length 1.8
  Top Layer w0.381: U2.21 L1.1
NetP4_1: P4.1 R3.1 U2.1 | length 8.1
  Top Layer w0.381: P4.1 40.889,74.076 ; R3.1@40.889,76.616 R3.1 40.889,74.076 ; U2.1 42.159,72.806 40.889,74.076
NetP6_1: P6.1 U2.2 | length 5.3
  Top Layer w0.381: P6.1 42.619,70.774 43.127,70.266 U2.2
NetP6_2: P6.2 U2.3 | length 5.3
  Top Layer w0.381: P6.2 42.619,68.234 43.127,67.726 U2.3
NetP8_2: P8.2 R5.1 U3.17 | length 15.7
  Top Layer w0.381: R5.1 52.065,21.498 54.478,21.498 P8.2 54.701,21.721 54.701,22.947 56.435,24.681 56.435,31.71 U3.17
NetP12_1: P12.1 R17.1 U2.28 | length 5.7
  Top Layer w0.381: R17.1 49.144,75.854 P12.1 50.871,74.128 50.871,72.985 U2.28
NetP13_2: P13.2 R18.1 | length 3.2
  Top Layer w0.381: P13.2 49.771,36.476 R18.1
NetP14_2: P14.2 R8.2 | length 2.5
  Top Layer w0.381: P14.2 R8.2
NetR7_1: R7.1 U4.8 | length 2.2
  Top Layer w0.381: R7.1 U4.8
NetU3_1: U3.1 U4.1 | length 14.6
  Bottom Layer w0.381: U3.1@55.927,25.003 U3.1 55.367,23.754 57.295,21.826 63.041,21.826 U4.1
NetU3_2: U3.2 U4.4 | length 6.9
  Top Layer w0.381: U4.4 57.907,19.642 58.669,20.404 58.669,24.498 57.907,25.26 U3.2
SCK_OUT: P7.4 U2.19 U3.13 | length 27.8
  Top Layer w0.381: U2.19 54.605,49.946 P7.4 62.225,35.722 62.733,35.214 62.764,35.214 62.987,34.991 66.259,34.991 U3.13
SPI_CS_n: P7.1 U2.16 U3.16 | length 16.8
  Top Layer w0.381: U2.16 P7.1 54.605,36.2 56.007,34.798 58.832,34.798 U3.16
UPSHIFT: P10.1 R9.1 U2.23 | length 33.5
  Top Layer w0.381: R9.1 37.095,37.906 37.886,38.697 37.886,39.196 P10.1 v1(38.984,43.596) ; v1(47.112,43.977) 49.271,46.136 49.271,59.883 49.495,60.106 U2.23
  Bottom Layer w0.381: v1(38.984,43.596) 45.277,43.596 45.658,43.977 v1(47.112,43.977)
VBATT: C1.2 C2.2 D1.1 P1.1 U1.1
VCC_5V: C5.2 C6.2 C3.2 C4.2 C11.1 C12.2 C13.1 D2.1 L1.2 P2.1 P2.2 P2.3 P5.1 P5.2 P5.3 P5.4 P7.5 P13.3 R3.2 R5.2 R9.2 R10.2 R11.1 R12.1 R17.2 U1.3 U2.7 U2.20 U3.18 U4.3 | length 4.1
  Top Layer w0.381: C6.2 41.86,56.632 42.495,56.632 U2.7 ; C13.1@45.715,31.452 C13.1 ; U2.20 C5.2
pads on no net: P14.3 U3.3 U3.4 U3.5 U3.6 U3.10 U3.11 U3.12 U4.5

## Polygon pours and split planes (outlines as drawn)
VCC_5V on Top Layer "Top Layer-VCC_5V" (solid, pour order 88): 0.249,22.006 48.509,22.006 48.509,14.259 61.463,14.259 61.463,22.387 59.304,22.387 59.304,16.926 50.287,16.926 50.287,22.006 52.827,22.006 52.827,25.816 55.621,26.832 56.383,33.436 56.383,34.198 53.208,34.198 53.081,28.102 48.509,27.086 48.509,25.816 46.731,25.816 46.731,32.166 46.985,32.166 46.985,36.865 43.937,36.865 43.937,25.816 30.729,25.816 30.729,36.611 34.666,36.611 34.793,36.738 34.793,36.865 36.317,36.865 36.317,38.897 34.793,38.897 34.793,40.675 33.269,40.675 33.269,42.707 31.364,42.707 31.364,40.675 29.459,40.675 29.459,25.816 28.443,25.816 28.443,29.626 20.442,29.626 20.442,25.816 11.171,25.816 11.171,37.881 4.059,37.881 4.059,91.856 21.839,91.856 21.839,88.427 21.331,88.427 21.331,88.554 18.537,88.554 18.537,86.268 18.664,86.268 18.664,82.331 18.156,82.331 18.156,74.711 23.109,74.711 23.109,80.299 39.873,80.299 39.873,77.251 44.318,77.251 44.318,56.677 40,56.677 41.905,54.772 43.175,56.042 45.588,56.042 45.715,56.169 45.334,56.55 45.334,78.013 54.859,78.013 54.859,56.931 53.462,56.931 53.462,54.391 52.065,54.391 52.065,50.454 53.716,50.454 53.716,53.629 56.891,53.629 56.891,56.515 63.5,56.515 63.5,41.402 65.786,41.402 65.913,41.275 65.913,58.039 56.891,58.039 56.891,78.013 58.034,78.013 59.939,79.918 59.939,87.157 48.636,87.157 43.517,83.085 38.527,83.062 38.527,84.871 24.379,84.871 24.379,99.476 40.381,99.476 40.381,95.666 42.159,95.666 42.159,102.016 21.839,102.016 21.839,97.952 0.503,97.952 0.249,98.206
VBATT on Top Layer "Top Layer-No Net 1" (solid, remove dead copper, pour order 16): 31.364,78.521 31.364,75.981 26.284,75.981 26.284,74.521 26.221,74.457 23.236,74.457 23.236,72.171 18.029,72.171 18.029,69.377 23.236,69.377 23.236,68.742 26.284,68.742 26.284,69.377 35.809,69.377 35.809,72.171 36.825,72.171 36.825,75.346 33.904,75.346 33.904,78.521
GND on Bottom Layer "Bottom Layer-GND" (solid, pour order 80): -3.048,-7.62 0.508,-11.176 3.556,-8.128 166.624,-8.128 166.624,98.552 159.512,105.664 -3.048,104.394

## Other copper
Top Layer:
  pour cut-out: 33.904,78.521 33.904,72.171 31.491,72.171 31.491,78.394 31.364,78.521
  pour cut-out: 50.287,78.648 47.493,78.648 47.493,76.997 50.287,76.997
  pour cut-out: 31.491,78.271 31.414,78.271 31.364,78.221 31.364,72.298 31.491,72.171
  pour cut-out: 28.57,76.235 28.57,72.552 31.364,72.552 31.364,76.235
Bottom Layer:
  pour cut-out: 50.033,59.598 50.033,58.836 52.573,58.836 52.573,59.598
  pour cut-out: 52.573,56.042 50.033,56.042 50.033,54.01 52.573,54.01
  pour cut-out: 58.034,89.443 43.683,89.443 43.683,76.235 58.034,76.235
  pour cut-out: 26.03,76.362 26.03,72.298 31.491,72.298 31.491,76.362
  pour cut-out: 35.809,75.346 33.269,75.346 33.269,72.171 35.809,72.171
  pour cut-out: 39.619,46.517 36.698,46.517 36.698,41.945 40.254,41.945 40.254,45.882
  pour cut-out: 39.365,58.582 39.365,54.01 40.889,54.01 43.175,56.296 44.191,56.296 44.445,56.55 44.445,58.582
  pour cut-out: 51.303,75.742 51.303,71.551 48.255,71.551 48.255,74.965 48.255,75.742
  pour cut-out: 48.763,47.152 45.588,47.152 45.588,42.072 48.763,42.072

## Silkscreen, mask and mechanical layers (free items; w line width, h text height)
Top Overlay:
  drawing of 13 lines, arcs and shapes, not listed
  text "Programming Header" at 66.675,69.85 h1.52 r270
Top Solder:
  text "Made By: Alex Walsh" at 25.654,6.477 h1.52
  text "QFSAE 2022-2023" at 26.924,2.667 h1.52